# Altium PCB Series2.PcbDoc
Units mil, origin at the board's own origin, x right, y up, seen from the top; angles counter-clockwise.
Board outline 1234.25 x 1004.72 mil, 4 copper layers (Top Layer, MidLayer1, MidLayer2, Bottom Layer); 58 components, 56 nets, 278 pads, 110 vias.
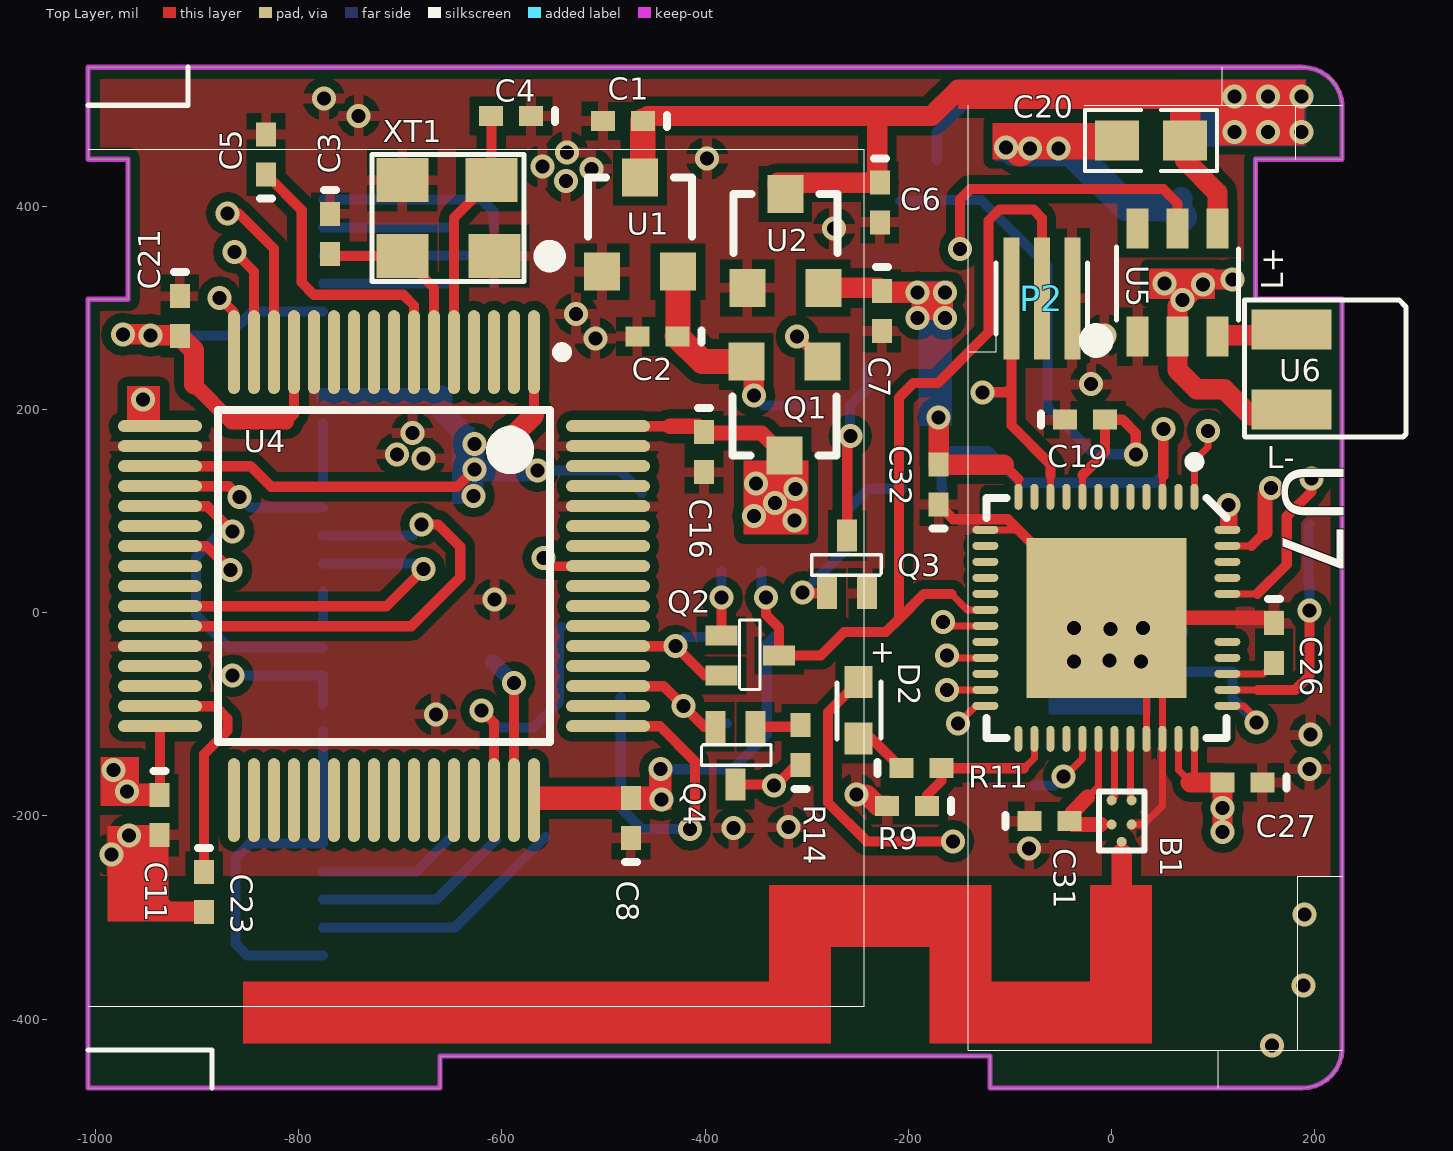
[diagram p0: Top Layer view]
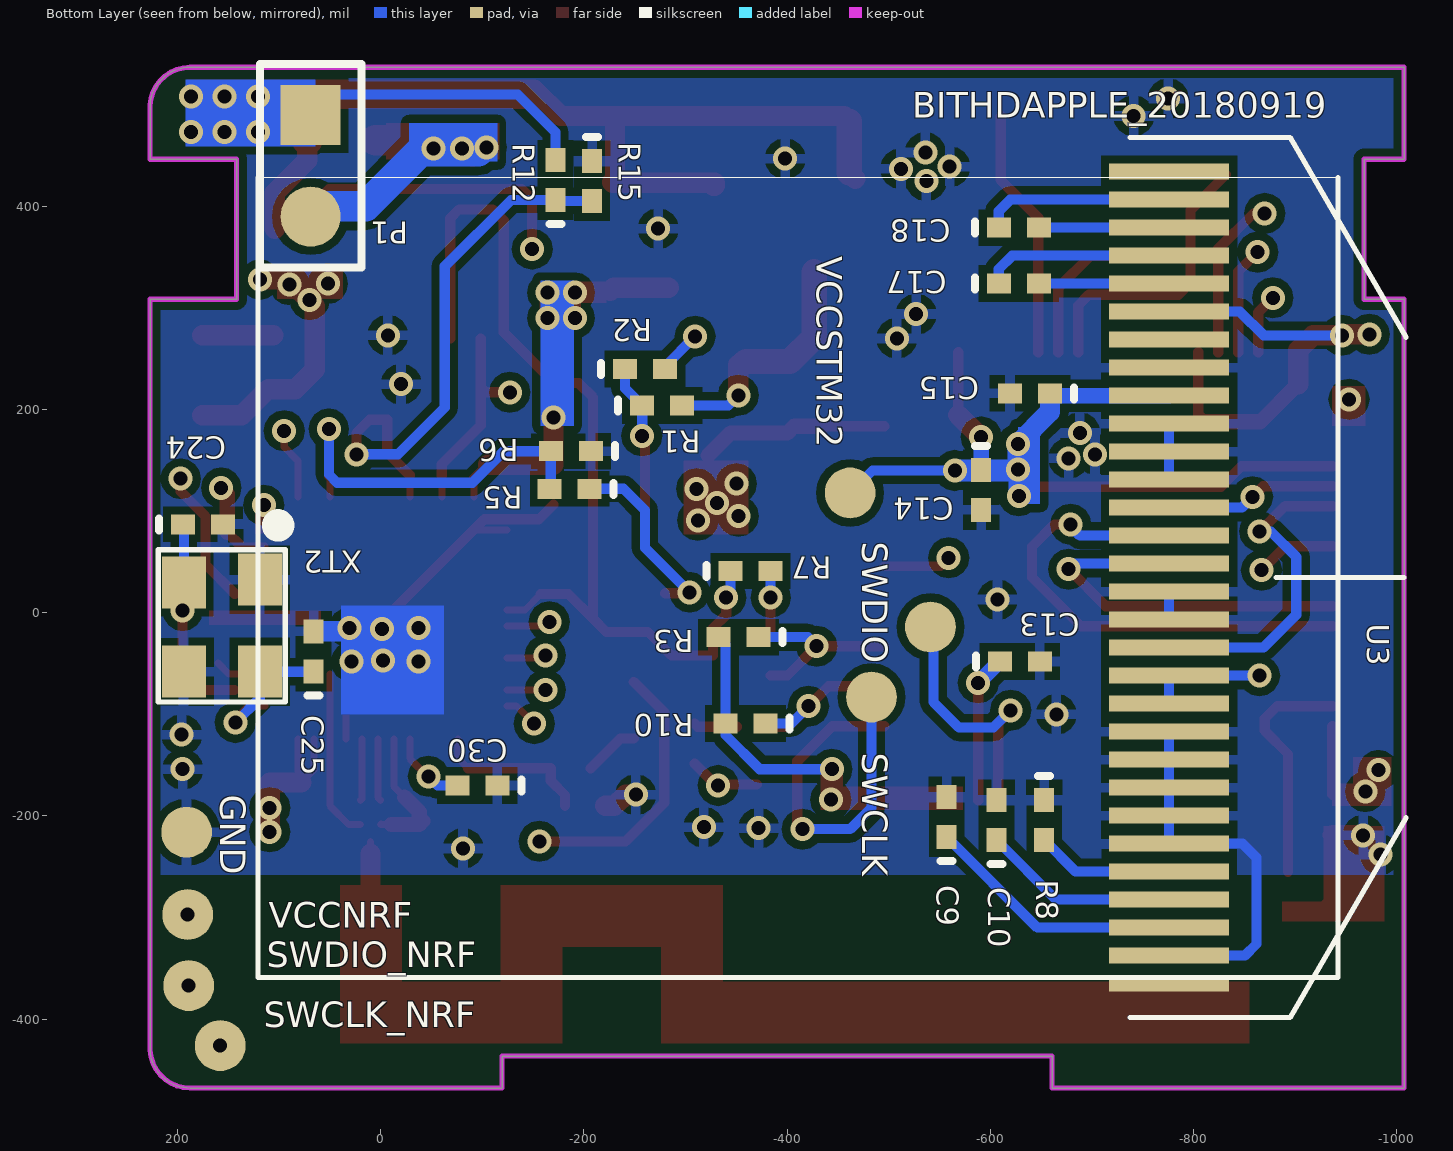
[diagram p1: Bottom Layer view, seen from below]
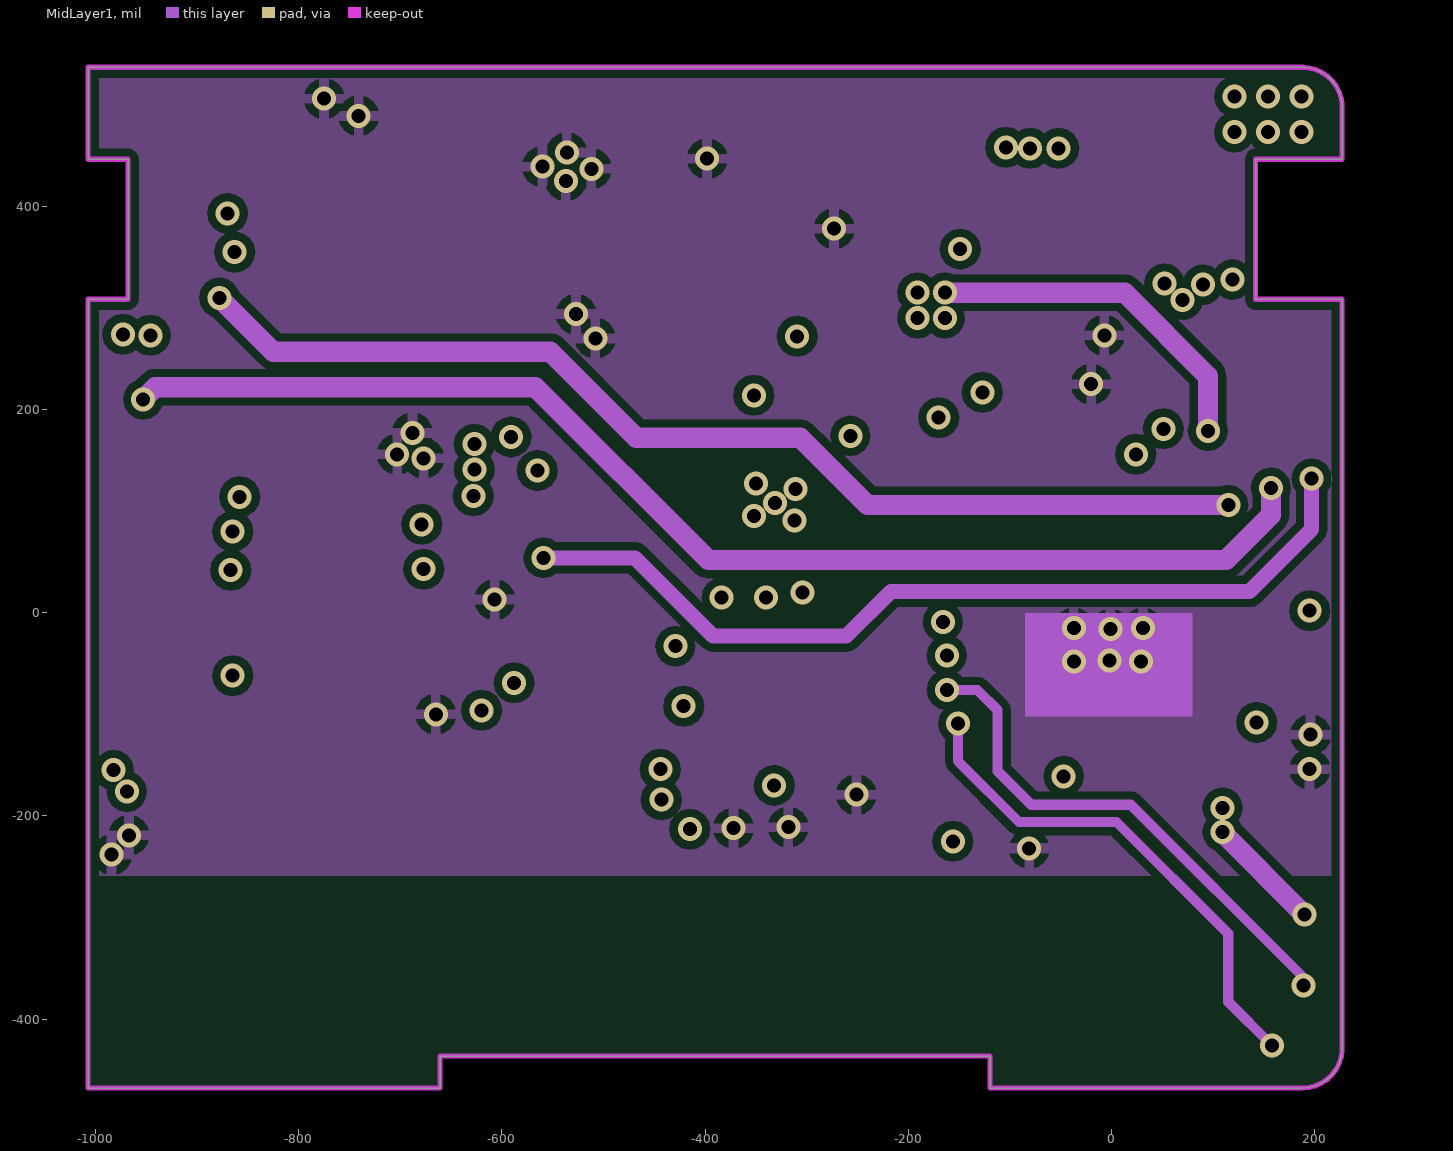
[diagram p2: MidLayer1]
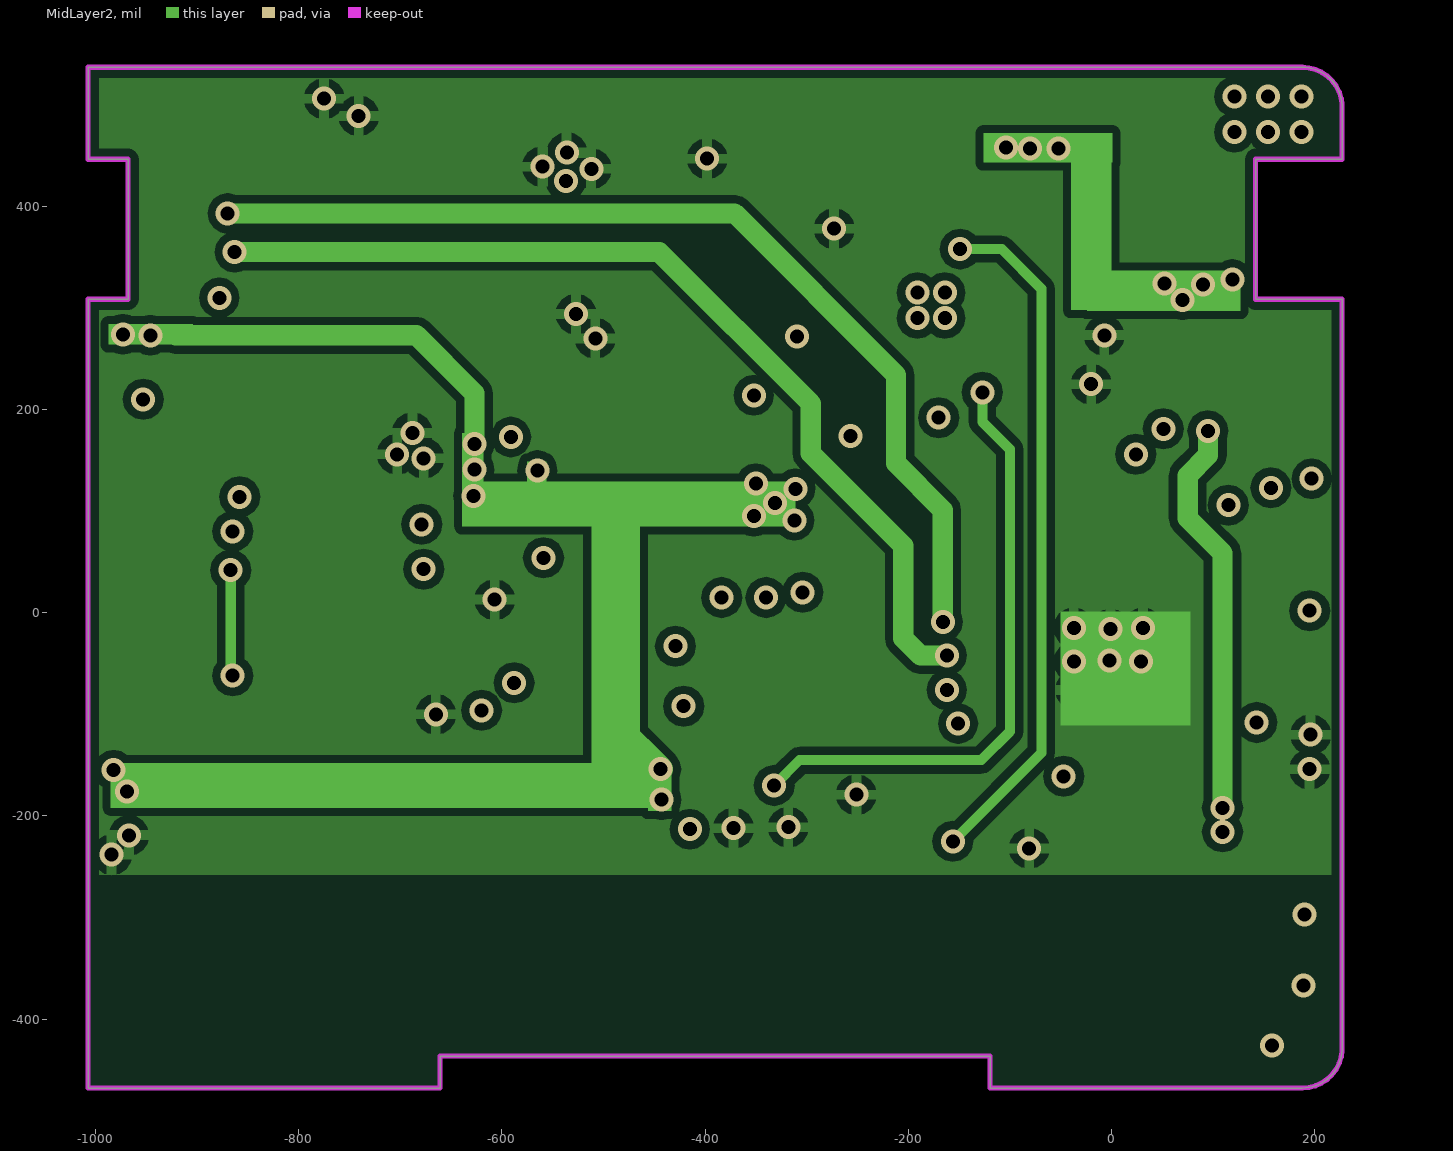
[diagram p3: MidLayer2]

## Layer stack, top to bottom
Top Layer: signal copper 1.4
Dielectric: core 12.6, FR-4, Dk 4.8
MidLayer1: signal copper 1.4
Dielectric: prepreg 12.6, FR-4, Dk 4.8
MidLayer2: signal copper 1.4
Dielectric: core 12.6, FR-4, Dk 4.8
Bottom Layer: signal copper 1.4

## Board outline
-1007.15,-467.79 -660.7,-467.79 -660.7,-436.3 -119.36,-436.3 -119.36,-467.79 187.78,-467.79 ccw(c187.78,-428.42) 227.1,-430.39 227.1,308.58 141.91,308.58 141.91,446.38 227.1,446.38 227.1,499.53 ccw(c187.78,497.56) 187.78,536.93 -1007.15,536.93 -1007.15,446.38 -967.78,446.38 -967.78,308.58 -1007.15,308.58

## Design rules (kind name [scope] priority, off if disabled: settings)
Clearance [All] p1: gap=7
ComponentClearance [All] p1 off: gap=10 collisioncheckmode=3 verticalgap=10 showdistances=FALSE
Height [All] p1 off: minheight=0 maxheight=1000 prefheight=500
HoleToHoleClearance [All] p1 off: gap=10 allowstackedmicrovias=TRUE
MinimumSolderMaskSliver [All] p1 off: minsoldermaskwidth=10
NetAntennae [All] p1 off: netantennaetolerance=0
PolygonConnect [All] p1: connectstyle=Relief reliefconductorwidth=10 reliefentries=4 polygonreliefangle="90 Angle"
RoutingVias [All] p1: holewidth=28 width=50 viastyle="Through Hole" minholewidth=1 minwidth=1 maxholewidth=100 maxwidth=100
SilkToSilkClearance [All] p1 off: silktosilkclearance=10
SilkscreenOverComponentPads [All] p1 off: minsilkscreentomaskgap=10
SolderMaskExpansion [All] p1: expansion=4
TestPointUsage [All] p1 off: valid=0 allowmultiple=FALSE
Testpoint [All] p1 off: side=15 testpointundercomponent=TRUE minsize=40 maxsize=100 preferedsize=60 minholesize=0 maxholesize=40 preferedholesize=32 testpointgrid=1 style=1021 order=0123456789
Width [All] p1: maxlimit=100 minlimit=1 preferedwidth=10 minimp=50.000000 maximp=50.000000 favimp=50.000000
17 further rules are at their usual default settings.

## Components (designator, comment, footprint, x,y, rotation, side; value= is the part's Value field where it differs from the comment)
B1 "BAL-NRF01D3" BAL-NRF01D3 10,-205 r270 top
C1 "1uF" 0402-a -481,484 r180 top
C2 "1uF" 0402-a -447,272 r180 top
C3 "22pF" 0402-A -769,373 r270 top
C4 "22pF" 0402-a -591,489 r180 top
C5 "1uF" 0402-a -832.01,451 r90 top
C6 "1uF" 0402-a -228,404 r270 top
C7 "1uF" 0402-A -226,297 r270 top
C8 "0.1uf" 0402-A -473.01,-202 r90 top
C9 "2.2uF" 0402-a -557.01,-201 r90 bottom
C10 "4.7uF" 0402-a -606.01,-204 r90 bottom
C11 "0.1uf" 0402-A -937.01,-199 r270 top
C13 "2.2uF" 0402-a -629.01,-48 r180 bottom
C14 "0.1uf" 0402-A -591.01,121 r270 bottom
C15 "1uF" 0402-a -639.01,216 r0 bottom
C16 "1uF" 0402-a -401.01,158 r270 top
C17 "1uF" 0402-a -628.01,324 r180 bottom
C18 "1uF" 0402-a -628.01,379 r180 bottom
C19 "2uf" 0402-a -26.01,190 r0 top
C20 "10uF" 0603-1 38.99,465 r180 top
C21 "0.1uf" 0402-A -917.01,292 r270 top
C23 "2.2uF" 0402-a -893.01,-275 r270 top
C24 "12Pf" 0402-a 175,87 r180 bottom
C25 "12Pf" 0402-a 66,-38 r90 bottom
C26 "0.1uf" 0402-A 159.99,-30 r270 top
C27 "1nf" 0402-a 128.99,-167 r180 top
C30 "47nf" 0402-A -95,-170 r0 bottom
C31 "2.2nf" 0402-A -61,-205 r0 top
C32 "0.1uf" 0402-A -170.01,126 r90 top
D2 "RB520S" sod523 -249.01,-68 r270 top
P1 "battery" HDR1X2 69,490 r270 bottom
P2 "MHDR1X3" BUTTONAPPLE -113.45,344.44 r0 top
Q1 "VIC1121" SOT-23 -322,201 r180 top
Q2 "3906" SOT523 -331.01,-42 r270 top
Q3 "LMBT3904" SOT523 -260.07,72 r0 top
Q4 "3906" SOT523 -370.01,-165 r180 top
R1 "1M" 0402-A -277.01,204 r180 bottom
R2 "1K" 0402-A -260.01,240 r180 bottom
R3 "1M" 0402-A -352.01,-24 r0 bottom
R5 "100K" 0402-A -186.01,122 r0 bottom
R6 "1M" 0402-A -187.01,159 r0 bottom
R7 "10K" 0402-A -364.01,41 r180 bottom
R8 "390K" 0402-A -653.01,-204 r270 bottom
R9 "30K" 0402-A -201.01,-190 r180 top
R10 "1M" 0402-A -359.01,-109 r0 bottom
R11 "10K" 0402-A -187.01,-153 r0 top
R12 "3M" 0402-A -172.01,426 r90 bottom
R14 "10K" 0402-A -306.01,-130 r90 top
R15 "1M" 0402-A -208.01,425 r270 bottom
U1 "MCP170" SOT-23 -464,382 r0 top
U2 "MCP170" SOT-23 -321,366 r0 top
U3 "Oled12864" oled12864 -776,34.57 r270 bottom
U4 "stm32f205ret" LQFP-64 -716,36 r270 top
U5 "SGD5141C" sot23-6 64.99,378 r0 top
U6 "coil" coil 176.99,279 r0 top
U7 "nRF51822-QFAA" QFN40P600X600X90-48N -5,-5 r270 top
XT1 "8Mhz" SMD3225 -698,351 r0 top
XT2 "16Mhz" SMD3225 119,-58 r90 bottom

## Footprints (in the part's own frame and the unit in brackets; to place one, negate y for a bottom-side part, rotate by r counter-clockwise, add the part's x,y. Pads: shape width x height; smd on the part's side, far side on the other; paste and mask are expansions set on the pad)
0402-a [mm] "Chip Inductor; Body 1 x 0.5 mm (LxW typ)"
  rect 0.6x0.5 smd: 1(-0.5,0) 2(0.5,0)
  silkscreen extent -1.1,-0.15 -1.1,0.15
0402-A [mm] "Chip Inductor; Body 1 x 0.5 mm (LxW typ)"
  rect 0.6x0.5 smd: 1(-0.5,0) 2(0.5,0)
  silkscreen extent -1.1,-0.15 -1.1,0.15
0603-1 [mm] "贴片带丝印"
  rect 1.1x1 smd: 1(-0.85,0) 2(0.85,0)
  silkscreen extent -1.65,-0.76 1.65,0.76, body extent -1.14,-0.38 1.14,0.38, height 1
BAL-NRF01D3 [mm] "ST BAL-NRF01D3"
  round 0.25 smd: 1(-0.519,-0.25) 2(-0.519,0.25) 3(0.085,-0.25) 4(0.085,0.25) 5(0.518,0)
  silkscreen extent -0.74,-0.57 0.74,0.57
BUTTONAPPLE [mil]
  rect 15.75x120 smd: 1(15,-35) 2(45,-35) 3(75,-35)
  silkscreen extent 0,-70 90,0
coil [mm]
  rect 2x1 smd: 1(0,0) 2(0,-2)
  silkscreen extent -1.17,-2.69 2.87,0.74
HDR1X2 [mm] "Connector; Header; 2 Position"
  rect 1.5x1.5 smd: 1(0,0)
  round 1.5 smd: 2(2.54,0)
  silkscreen extent -1.27,-1.27 3.81,1.27
LQFP-64 [mm] "LQFP64"
  oval 2.1x0.3 smd: 1(-5.6,3.75) 2(-5.6,3.25) 3(-5.6,2.75) 4(-5.6,2.25) 5(-5.6,1.75) 6(-5.6,1.25) 7(-5.6,0.75) 8(-5.6,0.25) 9(-5.6,-0.25) 10(-5.6,-0.75) 11(-5.6,-1.25) 12(-5.6,-1.75) 13(-5.6,-2.25) 14(-5.6,-2.75) 15(-5.6,-3.25) 16(-5.6,-3.75) 33(5.6,-3.75) 34(5.6,-3.25) 35(5.6,-2.75) 36(5.6,-2.25) 37(5.6,-1.75) 38(5.6,-1.25) 39(5.6,-0.75) 40(5.6,-0.25) 41(5.6,0.25) 42(5.6,0.75) 43(5.6,1.25) 44(5.6,1.75) 45(5.6,2.25) 46(5.6,2.75) 47(5.6,3.25) 48(5.6,3.75)
  oval 0.3x2.1 smd: 17(-3.75,-5.6) 18(-3.25,-5.6) 19(-2.75,-5.6) 20(-2.25,-5.6) 21(-1.75,-5.6) 22(-1.25,-5.6) 23(-0.75,-5.6) 24(-0.25,-5.6) 25(0.25,-5.6) 26(0.75,-5.6) 27(1.25,-5.6) 28(1.75,-5.6) 29(2.25,-5.6) 30(2.75,-5.6) 31(3.25,-5.6) 32(3.75,-5.6) 49(3.75,5.6) 50(3.25,5.6) 51(2.75,5.6) 52(2.25,5.6) 53(1.75,5.6) 54(1.25,5.6) 55(0.75,5.6) 56(0.25,5.6) 57(-0.25,5.6) 58(-0.75,5.6) 59(-1.25,5.6) 60(-1.75,5.6) 61(-2.25,5.6) 62(-2.75,5.6) 63(-3.25,5.6) 64(-3.75,5.6)
  silkscreen extent -5.72,-4.15 4.15,4.58, body extent -5,-5 5,5, height 1.6
oled12864 [mm]
  rect 0.4x3 smd: 1(-10.15,0) 2(-9.45,0) 3(-8.75,0) 4(-8.05,0) 5(-7.35,0) 6(-6.65,0) 7(-5.95,0) 8(-5.25,0) 9(-4.55,0) 10(-3.85,0) 11(-3.15,0) 12(-2.45,0) 13(-1.75,0) 14(-1.05,0) 15(-0.35,0) 16(0.35,0) 17(1.05,0) 18(1.75,0) 19(2.45,0) 20(3.15,0) 21(3.85,0) 22(4.55,0) 23(5.25,0) 24(5.95,0) 25(6.65,0) 26(7.35,0) 27(8.05,0) 28(8.75,0) 29(9.45,0) 30(10.15,0)
  silkscreen extent -11,-0.98 11,5.92
QFN40P600X600X90-48N [mm] "QFN, 48-Leads, Body 6,0x6,0mm (max), Pitch 0,40mm, IPC Medium Density"
  oval 0.65x0.2 smd: 1(-3.025,2.2) 2(-3.025,1.8) 3(-3.025,1.4) 4(-3.025,1) 5(-3.025,0.6) 6(-3.025,0.2) 7(-3.025,-0.2) 8(-3.025,-0.6) 9(-3.025,-1) 10(-3.025,-1.4) 11(-3.025,-1.8) 12(-3.025,-2.2) 25(3.025,-2.2) 26(3.025,-1.8) 27(3.025,-1.4) 28(3.025,-1) 29(3.025,-0.6) 30(3.025,-0.2) 31(3.025,0.2) 32(3.025,0.6) 33(3.025,1) 34(3.025,1.4) 35(3.025,1.8) 36(3.025,2.2)
  oval 0.2x0.65 smd: 13(-2.2,-3.025) 14(-1.8,-3.025) 15(-1.4,-3.025) 16(-1,-3.025) 17(-0.6,-3.025) 18(-0.2,-3.025) 19(0.2,-3.025) 20(0.6,-3.025) 21(1,-3.025) 22(1.4,-3.025) 23(1.8,-3.025) 24(2.2,-3.025) 37(2.2,3.025) 38(1.8,3.025) 39(1.4,3.025) 40(1,3.025) 41(0.6,3.025) 44(-0.6,3.025) 45(-1,3.025) 46(-1.4,3.025) 47(-1.8,3.025) 48(-2.2,3.025)
  oval 0.2x0.65 on Top Overlay: 42(0.2,3.025) 43(-0.2,3.025)
  rect 4x4 smd: 49(0,0)
  silkscreen extent -4.02,-3 3,3, body extent -3,-3 3,3, height 0.9
SMD3225 [mm]
  rect 1.3x1.1 smd: 1(0,0) 2(2.3,0) 3(2.23,1.9) 4(0,1.9)
  silkscreen extent -0.76,-0.64 3.81,2.54
sod523 [mm]
  rect 0.8x0.7 smd: 1(0,0) 2(1.42,0)
  silkscreen extent 0,-0.53 1.42,0.56
sot23-6 [mm]
  rect 0.55x1 smd: 1(-1,-2.7) 2(0,-2.7) 3(1,-2.7) 4(1,0) 5(0,0) 6(-1,0)
  silkscreen extent -2.21,-2.97 1.52,-0.46
SOT523 [mm]
  rect 0.5x0.8 smd: 1(-0.5,-1.34) 2(0.5,-1.34) 3(0,0.1)
  silkscreen extent -0.89,-0.89 0.85,-0.38
SOT-23 [mm]
  rect 0.9x0.95 smd: 1(-0.95,-1.175) 2(0.95,-1.175) 3(0,1.175)
  silkscreen extent -1.3,-0.3 1.3,1.18

## Part data
B1: "ST BAL-NRF01D3"
C1 C2 C3 C4 C5 C6 C7 C9 C10 C13 C15 C16 C17 C18 C20 C23: library part CAP-0.1UF, "SMD-CAP"
C8 C11 C14 C21: "Capacitor, X7R, ?0%"
C19: library part CAP, "Capacitor, X7R, ?0%"
C24 C25: library part C0402-12p, "Capacitor, NP0, ?%"
C26 C32: library part C0402-100n, "Capacitor, X7R, ?0%"
C27: library part C0402-1n0, "Capacitor, X7R, ?0%"
C30: library part C0402-47n, "Capacitor, X7R, ?0%"
C31: library part C0402-2n2, "Capacitor, X7R, ?0%"
D2: library part Diode, "Default Diode"
P1: library part "Header 2", "Header, 2-Pin"
P2: "Header, 3-Pin"
Q1: library part MOSFET-P, "P-Channel MOSFET"
Q2 Q4: library part 2N3906, "PNP General Purpose Amplifier"
Q3: library part 2N3904, "NPN General Purpose Amplifier"
R1 R2 R3 R5 R6 R7 R8 R9 R10 R11 R12 R14 R15: library part R-10K, "resistor"
U7: library part nRF51822-Q48-6x6_DCDC, "Multi-protocol Bluetooth Low Energy and 2.4GHz proprietary system-on-chip"
XT1 XT2: library part XT, "晶振"

## Free pads (board coordinates)
  round 50 smd far side: 0(-541.01,-14) 0(-483.01,-83) 0(-462.01,118) 0(157.99,-426) 0(188.99,-367) 0(189.99,-297) 0(190.99,-216)

## Via types
v1: diameter 23.62, hole 13.78, Top Layer to Bottom Layer, 110 vias

## Nets (pads, with @x,y where several pads share a name; then routed paths per layer and width w, separated by ;. In a path a pad name is that pad's centre, name@x,y a point inside that pad or via, vN(x,y) a via of type N, cw(c..) or ccw(c..) an arc to the next point about the centre after c; other vN are vias at no path point)
ADC_VBAT: C19.2 R12.1 R15.2 U7.8 | length 559.4
  Top Layer w7: U7.8 -28.62,135.39
  Top Layer w10: -28.62,135.39 -6.33,157.69 C19.2 10.99,190 23.99,177 v1(23.99,156)
  Bottom Layer w7: -191.01,405.31 -190.01,404.31
  Bottom Layer w10: R15.2 -191.01,405.31 R12.1@-173.01,405.31 ; R12.1 -128.33,406.32 -63.01,341 -63.01,202 -17.01,156 v1(23.99,156)
CHARGESTAUTS: R9.1 R11.2 U7.26 | length 157.2
  Top Layer w7: -86.01,-153 -75.87,-142.85 U7.26
  Top Layer w10: R9.1 -181.33,-179.32 -167.33,-165.31 R11.2 -86.01,-153
CTS: U4.14 U7.19 | length 1191.4
  Top Layer w7: v1(-166.01,-9) -162.14,-12.87 U7.19
  Top Layer w10: v1(-870.01,393) -859.01,393 -824.27,358.26 U4.14
  MidLayer2 w20: v1(-870.01,393) -371.01,393 -212.01,234 -212.01,147 -166.01,101 v1(-166.01,-9)
CTS_NODIC: U4.15 U7.21 | length 1092.8
  Top Layer w7: v1(-162.01,-42) -159.64,-44.37 U7.21
  Top Layer w10: v1(-863.01,355) -843.95,335.94 U4.15
  MidLayer2 w20: v1(-863.01,355) -445.01,355 -296.01,206 -296.01,157 -205.01,66 -205.01,-25 -188.01,-42 v1(-162.01,-42)
GND: B1.4 C1.2 C2.2 C3.1 C4.1 C5.2 C6.2 C7.2 C8.1 C9.2 C10.2 C11.2 C13.2 C14.2 C15.2 C16.2 C19.1 C21.1 C23.2 C24.2 C25.2 C26.1 C27.1 C30.1 C31.1 C32.1 P2.3 pad.0@190.99,-216 Q3.2 R6.1 R8.1 R9.2 R15.1 U1.1 U2.1 U3.8 U3.10 U3.11 U3.12 U3.16 U3.17 U3.21 U3.22 U3.23 U3.24 U3.25 U3.29 U4.12 U4.18 U4.28 U4.60 U4.63 U5.1 U7.13 U7.33 U7.34 U7.49 XT1.2 XT1.4 XT2.2 XT2.4 | length 1159.1
  Top Layer w7: U7.13 -91.61,81.61 ; B1.4 31.64,-208.36 50.12,-189.88 U7.34 U7.49@50.12,-60.12 ; U7.33 U7.49@34.37,-44.37
  Top Layer w10: C11.2 -937.01,-280 -922.33,-294.69 C23.2 ; C32.1 -155.7,92 -102,92 -91.61,81.61 U7.49
  Top Layer w20: v1@-966.7,-218.69 C11.2 ; v1(-251.01,-179) -241.01,-179 -230.01,-190 R9.2
  Bottom Layer w10: U3.29 -850.53,-337.48 -862.01,-326 -862.01,-241 -848.25,-227.24 U3.25 U3.24 U3.23 U3.22 U3.21 ; U3.17 U3.16 ; U3.12 U3.11 U3.10
  Bottom Layer w20: v1@34.3,-18.31 C25.2
  other v1: -984.01,-238 -81.01,-232 -967.01,-219 -372.01,-212 -318.01,-211 194.99,-154 195.99,-120 -665.01,-100 -37.01,-48 28.99,-47.99 -2.01,-47 -1.01,-16 -37.01,-15 30.99,-15 -607.01,13 -677.01,152 -703.01,156 -688.01,177 -20.01,225 -508.01,270 -7.01,273 -527.01,294 -273.01,378 -273.01,378 -537.01,425 -512.01,437 -560.01,439 -398.01,447 -536.01,453 -741.01,489 -775.01,506
KEY1: Q2.2 R3.1 U4.53 | length 184.8
  Top Layer w10: U4.53 v1(-429.11,-32.9) -400.33,-61.69 Q2.2
  Bottom Layer w10: v1(-429.11,-32.9) -420.22,-24 R3.1
KEY1_NODIC: P2.2 Q2.3 R7.1 U7.18 | length 950.2
  Top Layer w7: -157.41,18.4 -141.89,2.87 U7.18
  Top Layer w10: v1(-340.01,15) -340.01,-2 -327.07,-14.94 Q2.3 -286.01,-42 -263.01,-19 -222.01,-19 -209.01,-6 ; -157.41,18.4 -184.62,18.4 -209.01,-6 ; P2.2@-68.45,270 P2.2 ; P2.2@-68.45,313.44 P2.2 ; -209.01,-6 -209.01,212 -195.01,226 -171.01,226 -121.01,276 -121.01,386 -110.01,397 -77.01,397 -68.45,388.44 P2.2
  Bottom Layer w10: R7.1 -344.33,19.32 v1(-340.01,15)
KEY2: Q4.2 R10.1 U4.51 | length 171.7
  Top Layer w10: U4.51 -440.74,-72.27 -400.77,-112.24 Q4.2
  Bottom Layer w10: v1(-421.01,-92) -404.01,-109 R10.1
KEY2_NODIC: P2.1 Q4.3 R14.1 U7.10 | length 868.2
  Top Layer w7: U7.10 -60.12,135
  Top Layer w10: Q4.3 v1@-332.01,-168.94 ; v1@-329.26,-168.94 R14.1@-309.01,-148.68 ; v1(-127.01,217) -103.45,217 -98.45,222 ; P2.1@-98.45,270 -98.45,222 ; -60.12,135 -60.12,146.11 -98.45,184.44 -98.45,222
  MidLayer2 w10: v1(-332.01,-170) -307.01,-145 -128.01,-145 -100.01,-117 -100.01,161 -127.01,188 v1(-127.01,217)
L+: U5.3 U6.1 | length 70.3
  Top Layer w20: U5.3@105.66,273 U6.1@175.99,273
L-: C20.2 P1.2 U5.2 U6.2 | length 566.9
  Top Layer w20: v1(118.99,328) 90.99,328 64.99,302 U5.2 64.99,239 83.99,220 110.99,220 136.73,194.26 U6.2@175.99,194.26
  Top Layer w30: v1@-90.01,454 -79.01,465 C20.2
  Bottom Layer w22: P1.2 P1.2@69,408
  Bottom Layer w30: v1@-96.01,454 -39.01,454 14.99,400 59,400 P1.2
  other v1: 69.99,308 89.99,323 51.99,324 -80.01,457 -52.01,457 -104.01,458
NetB1_1: B1.1 U7.31 | length 61.6
  Top Layer w7: B1.1 2.87,-181.87 U7.31
NetB1_2: B1.2 U7.32 | length 61
  Top Layer w7: U7.32 18.62,-183.36 B1.2
NetB1_3: B1.3 C31.2 U7.30 | length 141.7
  Top Layer w7: C31.2 C31.2@-41.31,-199.31 ; -23.5,-181.5 -12.87,-170.87 U7.30 ; -10.36,-208.36 B1.3 B1.3@-0.2,-208
  Top Layer w15: -23.5,-181.5 -38,-196 -38,-201.69 C31.2 -37.95,-208.36 -10.36,-208.36
NetC9_1: C9.1 U3.28 | length 256
  Bottom Layer w10: U3.28 -646.25,-309.92 C9.1
NetC10_1: C10.1 U3.27 | length 194.3
  Bottom Layer w10: U3.27 -664.69,-282.36 C10.1
NetC13_1: C13.1 U4.47 | length 145.5
  Top Layer w10: U4.47 v1(-588.01,-69) v1(-588.01,-69)
  Bottom Layer w15: C13.1 -609.01,-48 v1(-588.01,-69)
NetC17_1: C17.1 U3.4 | length 187.4
  Bottom Layer w10: U3.4 -621.51,351.5 -608.33,338.32 C17.1
NetC17_2: C17.2 U3.5 | length 128.3
  Bottom Layer w10: U3.5 -775.94,324 C17.2
NetC18_1: C18.1 U3.2 | length 188.7
  Bottom Layer w10: U3.2 -619.63,406.62 -608.33,395.32 C18.1
NetC18_2: C18.2 U3.3 | length 128.2
  Bottom Layer w10: U3.3 C18.2@-647.75,379.06
NetC23_1: C23.1 U4.31 | length 232.3
  Top Layer w10: U4.31 -882.06,-91.95 -870.01,-104 -870.01,-116 -893.01,-139 C23.1
NetC24_1: C24.1 U7.38 XT2.3 | length 236.4
  Top Layer w7: U7.38 144.13,-75.87
  Top Layer w10: 144.13,-75.87 180.99,-75.87 195,-61.85 v1(195,2)
  Bottom Layer w10: C24.1 193.8,86.12 XT2.3 195,28.6 v1(195,2)
NetC25_1: C25.1 U7.37 XT2.1 | length 151.1
  Top Layer w7: U7.37 130.61,-91.61 143,-104 v1(143,-108)
  Bottom Layer w10: C25.1 66.32,-58 XT2.1 119,-84 v1(143,-108)
NetC26_2: C26.2 U7.39 | length 50.2
  Top Layer w7: U7.39 149.56,-60.12 C26.2
NetC30_2: C30.2 U7.29 | length 77.1
  Top Layer w7: v1(-47,-161) -46,-161 -28.62,-143.62 U7.29
  Bottom Layer w10: C30.2 -56,-170 v1(-47,-161)
NetD2_1: D2.1 U5.5 | length 1244.3
  Top Layer w10: D2.1 -279.01,-98 -279.01,-187 -241.01,-225 v1(-156.01,-225) ; v1(-149.01,358) -149.01,407 -139.01,417 50.99,417 64.99,403 U5.5
  MidLayer2 w10: v1(-156.01,-225) -69.01,-138 -69.01,319 -108.01,358 v1(-149.01,358)
NetD2_2: D2.2 R11.1 | length 54.4
  Top Layer w10: D2.2 -235.79,-123.91 R11.1
NetQ1_1: Q1.1 R2.2 | length 79.3
  Top Layer w10: v1(-309.34,272) Q1.1
  Bottom Layer w10: v1(-309.34,272) -279.7,242.36 R2.2
NetQ2_1: Q2.1 R7.2 | length 63.3
  Top Layer w10: Q2.1 v1@-383.77,14.93
  Bottom Layer w10: v1@-383.77,15 -383.7,15.07 R7.2
  other v1: -383.7,15
NetQ3_1: Q3.1 R5.1 | length 186.8
  Top Layer w10: v1(-304.01,20) -303.26,19.24 Q3.1
  Bottom Layer w10: v1(-304.01,20) -260.01,64 -260.01,101 -239.01,122 R5.1
NetQ3_3: Q3.3 R1.1 R2.1 | length 233.1
  Top Layer w10: Q3.3@-260.07,72 -260.07,170.94 v1@-260.01,171 ; -260.01,113.94 v1@-260.01,171 ; v1(-257.01,174) v1@-260.01,171
  Bottom Layer w10: v1@-257.33,174.32 R1.1 -240.33,221 R2.1
NetQ4_1: Q4.1 R14.2 | length 42.5
  Top Layer w10: Q4.1 -311.94,-112.24 R14.2@-309.01,-109.31
NetR8_2: R8.2 U3.26 | length 135.9
  Bottom Layer w10: U3.26 -684.13,-254.8 R8.2
OLED_CS: U3.13 U4.20 | length 231.7
  Top Layer w10: U4.20 -868.59,124.58 v1(-858.01,114)
  Bottom Layer w10: v1(-858.01,114) -847.48,103.47 U3.13 -838.48,103.47
OLED_DC: U3.15 U4.26 | length 375.8
  Top Layer w10: U4.26 -713.54,6.47 v1(-677.01,43)
  Bottom Layer w10: U3.15 -682.36,48.35 v1(-677.01,43)
OLED_RST: U3.14 U4.27 | length 495.3
  Top Layer w10: U4.27 -689.22,-13.21 -641.01,35 -641.01,65 -663.01,87 v1(-679.01,87)
  Bottom Layer w10: U3.14 -688.1,75.91 -679.01,85 v1(-679.01,87)
OSCIN: C4.2 U4.5 XT1.3 | length 248
  Top Layer w10: U4.5 -647.1,388.91 XT1.3 -610.2,488.52 C4.2
OSCOUT: C3.2 U4.6 XT1.1 | length 179.4
  Top Layer w10: C3.2 -766.69,351 XT1.1 -666.79,319.79 U4.6
RESET: C5.1 U4.7 | length 286.7
  Top Layer w10: C5.1 -797.01,396.32 -797.01,325 -785.01,313 -697.01,313 -686.47,302.46 U4.7
RXD: U4.17 U7.47 | length 1319.4
  Top Layer w7: U7.47 137.87,65.87
  Top Layer w10: 137.87,65.87 151,79
  Top Layer w15: 151,79 151,117 v1(157,123)
  MidLayer1 w20: v1(-953.01,210) -941.01,222 -567.01,222 -397.01,52 112.99,52 157,96.01 v1(157,123)
RXD_NODIC: U4.16 U7.48 | length 1161.8
  Top Layer w7: U7.48 114.09,105.09 v1(115,106)
  Top Layer w10: v1(-878.01,310) -863.64,295.63 U4.16
  MidLayer1 w20: v1(-878.01,310) -825.01,257 -552.51,257 -467.76,172.25 -306.26,172.25 -240.01,106 v1(115,106)
SLEC_FUNCTION: U4.57 U7.44 | length 1129.8
  Top Layer w7: 130.62,18.62 U7.44 143.62,18.62
  Top Layer w9: v1(-559.01,54) -550.85,45.84 U4.57
  Top Layer w10: 143.62,18.62 172.5,47.5 172.5,94.85 196.99,119.34 v1(196.99,132)
  MidLayer1 w15: v1(-559.01,54) -469.01,54 -392.01,-23 -261.01,-23 -217.01,21 135.99,21 196.99,82 v1(196.99,132)
SPI_CLK: U3.18 U4.21 | length 323.5
  Top Layer w10: U4.21 -889.91,104.9 v1(-865.01,80)
  Bottom Layer w10: v1(-865.01,80) -876.01,80 -901.01,55 -901.01,-2 -868.68,-34.33 U3.18
SPI_DIN: U3.19 U3.20 U4.23 | length 297.6
  Top Layer w10: U4.23 -890.54,65.53 v1(-866.9,41.88)
  MidLayer2 w10: v1@-866.9,-59.89 v1(-866.9,41.88)
  Bottom Layer w10: v1(-864.9,-61.89) U3.19 U3.20
STM_POWERCONTROUL: R5.2 R6.2 U7.3 | length 383.8
  Top Layer w7: U7.3 50.12,134.87
  Top Layer w10: 50.99,134.87 v1(50.99,181)
  Bottom Layer w10: R5.2 -167.33,123 R6.2 -121.01,159 -90.01,128 42.99,128 50.99,136 v1(50.99,181)
SWCLK: pad.0@-483.01,-83 U4.49 | length 354.5
  Top Layer w10: U4.49 -444.37,-111.64 -410.01,-146 -410.01,-208 v1(-415.01,-213)
  Bottom Layer w10: pad.0@-483.01,-83 -483.01,-192 -462.01,-213 v1(-415.01,-213)
SWDCLK_NODIC: pad.0@157.99,-426 U7.24 | length 535.3
  Top Layer w7: v1(-151.01,-109) -133.63,-91.61 U7.24
  MidLayer1 w10: v1(-151.01,-109) -151.01,-146 -91.01,-206 4.99,-206 114.99,-316 114.99,-383 v1(157.99,-426)
SWDIO: pad.0@-541.01,-14 U4.46 | length 262.2
  Top Layer w10: v1(-620.01,-96) -607.73,-108.28 U4.46
  Bottom Layer w10: v1(-620.01,-96) -603.01,-113 -569.01,-113 -544.01,-88 -544.01,-17 pad.0@-541.01,-14
SWDIO_NODIC: pad.0@188.99,-367 U7.23 | length 574.1
  Top Layer w7: v1(-162.01,-76) -161.88,-75.87 U7.23 -147.88,-75.87
  MidLayer1 w7: v1@-163.01,-76 v1(-162.01,-76)
  MidLayer1 w10: v1(-162.01,-76) -132.01,-76 -112.01,-96 -112.01,-156 -79.01,-189 18.99,-189 188.99,-359 v1(188.99,-367)
SWO: U4.55
TIANXIAN: B1.5 | length 60.6
  Top Layer w7: 10,-237 B1.5
  Top Layer w20: 10,-286 10,-237
VBAT+: C1.1 C6.1 C20.1 P1.1 R12.2 U1.3 U2.3 U5.4 | length 1226.2
  Top Layer w20: U1.3@-467,427.26 U1.3@-461.32,432.95 ; C1.1 -456.32,489 -230,489 ; U2.3@-327,420.26 -328.74,420.26 -328.74,423.26 -228.43,423.26 C6.1 ; C6.1@-230.57,426.26 -230.57,488.43 -230,489 ; C20.1 72.45,445.54 104.36,413.63 U5.4 ; v1(121,508) 114,515 -151,515 -177,489 -230,489
  Top Layer w25: U1.3@-461.32,432.95 C1.1
  Top Layer w30: C20.1 72.45,501.54
  Bottom Layer w10: R12.2 -172.01,473 -135.01,510 P1.1@49,510
  other v1: 121,473 154,473 187,473 154,508 187,508
VCC33_LDO2: C2.1 Q1.2 R1.2 U1.2 | length 240.4
  Top Layer w20: C2.1 C2.1@-426.6,272.72 ; Q1.2 -355.22,247.26 -352.01,244.05 v1(-352.01,214)
  Top Layer w25: C2.1 -402.57,247.26 Q1.2 ; C2.1@-426.6,272.72 U1.2
  Bottom Layer w10: v1(-352.01,214) -342.01,204 R1.2
VCC33_STM32: C8.2 C11.1 C14.1 C15.1 C16.1 C21.2 pad.0@-462.01,118 Q1.3 R3.2 R10.2 U3.6 U3.9 U4.1 U4.13 U4.19 U4.32 U4.48 U4.64 | length 2364.2
  Top Layer w10: C11.1 -936.47,-178.78 U4.32 ; U4.19 -847.28,144.27 -827.01,124 -644.01,124 v1(-627.01,141) ; -812.01,188 -804.58,195.43 U4.13 ; v1@-591.01,172 v1@-590.01,173 ; -568.36,194.65 U4.1 ; U4.64 -434.65,183.64
  Top Layer w15: -903.01,225 -866.01,188 -812.01,188 ; -434.65,183.64 -406.96,183.64 -400.33,177 -344.26,177 Q1.3
  Top Layer w20: v1(-973.01,274) v1@-947.01,274 ; v1(-946.01,273) -917.7,273 C21.2 -903.01,258.31 -903.01,225 ; v1(-591.01,173) -590.01,173 -568.36,194.65
  MidLayer2 w20: -921.01,273 -684.01,273 -627.01,216 v1(-627.01,166)
  MidLayer2 w25: -486.01,93 -486.01,-112 v1(-444.01,-154)
  Bottom Layer w10: v1(-946.01,273) -869.01,273 -845.63,296.38 U3.6 ; v1(-565.01,140) -484.01,140 pad.0@-462.01,118 ; v1(-444.01,-154) -373.01,-154 -339.33,-120.31 R10.2 -339.33,-31 R3.2
  Bottom Layer w15: U3.9 C15.1@-658.7,213.7 ; C15.1 C15.1@-658.7,213.7 ; C15.1@-658.31,213.7 C15.1@-658.7,213.7 ; C14.1 v1(-591.01,173)
  Bottom Layer w20: C15.1@-658.7,213.7 -658.7,197.68 v1(-627.01,166) v1(-627.01,141) ; v1(-628.01,115) v1@-628.01,140
  other v1: -443.01,-184 -969.01,-176 -982.01,-155 -312.01,91 -352.01,95 -331.01,108 -311.01,122 -350.01,127
VCC_NRF: C7.1 C27.2 C32.2 pad.0@189.99,-297 U2.2 U7.1 U7.12 U7.35 U7.36 | length 1304.9
  Top Layer w7: U7.12 -91.61,131.6 ; U7.35 65.87,-154.88 77.99,-167 81.61,-163.37 U7.36 ; U7.1 81.61,149.63 94.99,163 v1(94.99,179)
  Top Layer w10: -105.7,145.69 -91.61,131.6
  Top Layer w20: U2.2 -229.05,319.74 C7.1 ; v1(-170.01,192) C32.2 -105.7,145.69 ; 77.99,-167 C27.2 v1(109.3,-192) v1(109.3,-215.69)
  MidLayer1 w20: v1(-164.01,315) 12.99,315 94.99,233 v1(94.99,179) ; v1(109.3,-215.69) 109.3,-216.31 v1(189.99,-297)
  MidLayer2 w20: v1(94.99,179) 94.99,155 74.99,135 74.99,93 109.3,58.69 v1(109.3,-192)
  other v1: -191.01,290 -164.01,290 -191.01,315
pads on no net: U3.1 U3.7 U3.30 U4.2 U4.3 U4.4 U4.8 U4.9 U4.10 U4.11 U4.22 U4.24 U4.25 U4.29 U4.30 U4.33 U4.34 U4.35 U4.36 U4.37 U4.38 U4.39 U4.40 U4.41 U4.42 U4.43 U4.44 U4.45 U4.50 U4.52 U4.54 U4.56 U4.58 U4.59 U4.61 U4.62 U5.6 U7.2 U7.4 U7.5 U7.6 U7.7 U7.9 U7.11 U7.14 U7.15 U7.16 U7.17 U7.20 U7.22 U7.25 U7.27 U7.28 U7.40 U7.41 U7.42 U7.43 U7.45 U7.46

## Polygon pours and split planes (outlines as drawn)
GND on Top Layer "Top Layer-No Net" (solid, remove dead copper, pour order 1000): 227.1,-259 -1007.15,-259 -1007.15,308.58 -967.78,308.58 -967.78,446.38 -1007.15,446.38 -1007.15,536.93 187.78,536.93 189.7,536.93 227.1,499.53 227.1,446.38 141.91,446.38 141.91,308.58 227.1,308.58
GND on MidLayer1 "Top Layer-No Net" (solid, remove dead copper, pour order 1001): -1007.15,536.93 -1007.15,446.38 -967.78,446.38 -967.78,308.58 -1007.15,308.58 -1007.15,-257 -1005.15,-259 227.1,-259 227.1,308.58 141.91,308.58 141.91,446.38 227.1,446.38 227.1,499.53 189.7,536.93 187.78,536.93 -1007.15,536.93
GND on MidLayer2 "Top Layer-No Net" (solid, remove dead copper, pour order 1002): -1007.15,536.93 -1007.15,446.38 -967.78,446.38 -967.78,308.58 -1007.15,308.58 -1007.15,-258 226.1,-258 227.1,-259 227.1,308.58 141.91,308.58 141.91,446.38 227.1,446.38 227.1,499.53 225.18,499.53 187.78,536.93 -1007.15,536.93
GND on Bottom Layer "Top Layer-No Net" (solid, remove dead copper, pour order 1003): -1007.15,536.93 -1007.15,446.38 -967.78,446.38 -967.78,308.58 -1007.15,308.58 -1007.15,-259 -1006.15,-258 227.1,-258 227.1,308.58 141.91,308.58 141.91,446.38 227.1,446.38 227.1,499.53 189.7,536.93 187.78,536.93

## Keep-outs
Keep-Out Layer:
  the board outline again, w5

## Other copper
Top Layer:
  rectangle net GND: 59,-12 169,2
  rectangle net GND: -976.01,-304 -887.01,-284
  rectangle net GND: -988.01,-304 -928.01,-210
  rectangle net VCC33_STM32: -455.01,-194 -433.01,-154
  rectangle net VCC33_STM32: -362.01,77 -298.01,150
  rectangle net VCC_NRF: -197.01,288 -156.01,326
  rectangle net VCC_NRF: -222.01,305 -176.01,326
  rectangle net VCC33_STM32: -573.01,-194 -433.01,-171
  rectangle net VCC33_STM32: -995.01,-190 -957.01,-142
  rectangle net VCC33_STM32: -995.01,-190 -936.47,-168
  rectangle net RXD: -969.01,183.64 -936.47,223
  rectangle net VBAT+: 106,460 190,523
  rectangle net VBAT+: -151,496 191,525
  rectangle net RXD_NODIC: 107,78 124,111
  region net TIANXIAN: -179,-362.98 -179,-424 40.02,-424 40.02,-362.98
  region net TIANXIAN: -855,-362.98 -855,-424 -275.98,-424 -275.98,-362.98
  rectangle net TIANXIAN: -21,-424 40.02,-268
  rectangle net TIANXIAN: -179,-424 -117.98,-268
  rectangle net TIANXIAN: -337,-424 -275.98,-268
  region net TIANXIAN: -337,-268 -337,-329.02 -117.98,-329.02 -117.98,-268
  rectangle net L-: -117.01,446 -5.01,482
  rectangle net L-: 36.99,309 101.99,339
MidLayer1:
  rectangle net GND: -85.01,-102 79.99,0
MidLayer2:
  rectangle net GND: -50.33,-111 77.99,1.13
  rectangle net VCC33_STM32: -512.01,-166 -464.01,97
  rectangle net VCC33_STM32: -985.01,-192 -436.01,-148
  rectangle net VCC33_STM32: -987.01,264 -904.01,284
  rectangle net VCC33_STM32: -575.01,117 -556.01,149
  rectangle net VCC33_STM32: -456.01,-195 -433.01,-148
  rectangle net VCC33_STM32: -639.01,97 -618.01,177
  rectangle net VCC33_STM32: -639.01,85 -311.01,129
  rectangle net L-: -24.01,297 126.99,337
  rectangle net L-: -40.01,298 -0.01,467
  rectangle net L-: -126.01,443 0.99,472
Bottom Layer:
  rectangle net GND: -62.01,-100 38.99,7
  rectangle net VCC_NRF: -190.01,184 -157.01,327
  rectangle net VCC33_STM32: -649.01,107 -627.01,183
  rectangle net VCC33_STM32: -627.01,129 -564.01,151
  rectangle net VBAT+: 64,459 192,525
  rectangle net L-: -115.01,444 -28.01,482

## Silkscreen, mask and mechanical layers (free items; w line width, h text height)
Top Overlay:
  lines w1: -1007.15,-387.09 -243.37,-387.09 -243.37,456.22 -1007.15,456.22 ; -141.01,257 -113.45,257 -113.45,344.44 ; -141.01,499.53 -141.01,-430.39 -113.45,-430.39 -7.15,-430.39 105.05,-430.39 ; -27.01,499.53 -7.15,499.53 108.99,499.53 ; 105.05,-467.79 105.05,-430.39 ; 108.99,536.93 108.99,499.53 ; 181.28,446.38 181.28,499.53 ; 183.57,-430.39 183.57,-259.13 227.1,-259.13 ; 227.1,-430.39 105.05,-430.39 ; 227.1,499.53 108.99,499.53
  lines w5: -1007.15,-430.39 -885.11,-430.39 -885.11,-467.79 ; -1007.15,499.53 -908.73,499.53 -908.73,536.93
  text "+" at -238.01,-49 h22
Bottom Overlay:
  lines w1: -942.35,428.27 120.96,428.27
  lines w5: -1007.15,34.57 -881.01,34.57 ; -942.35,428.27 -942.35,-359.13 120.96,-359.13 120.96,428.27
  text "BITHDAPPLE_20180919" at -523.01,487 h25
  text "VCCSTM32" at -429.01,351 h25 r90
  text "SWDIO" at -474.01,70 h25 r90
  text "SWCLK" at -474.01,-138 h25 r90
  text "GND" at 157.99,-179 h25 r90
  text "VCCNRF" at 109.99,-310 h25
  text "SWDIO_NRF" at 111.99,-349 h25
  text "SWCLK_NRF" at 114.99,-408 h25
Top Solder:
  region: -855,-362.98 -855,-424 -275.98,-424 -275.98,-362.98
  rectangle: -337,-424 -275.98,-268
  region: -337,-268 -337,-329.02 -117.98,-329.02 -117.98,-268
  rectangle: -179,-424 -117.98,-268
  region: -179,-362.98 -179,-424 40.02,-424 40.02,-362.98
  region: 40.02,-268 -21,-268 -21,-424 40.02,-424

## Text inside footprints (layer, text, board x,y; h text height)
U6: Top Overlay "L+" at 168.98,318 h22 r90; Top Overlay "L-" at 152.98,142 h22